# Altium PCB PCB1.PcbDoc
Units mm, origin at the board's own origin, x right, y up, seen from the top; angles counter-clockwise.
Board outline 45.72 x 38.1 mm, 2 copper layers (Top Layer, GND), stack 1.569 mm thick; 24 components, 18 nets, 130 pads, 10 vias.
Unrouted connection lines stored in the file: 1.
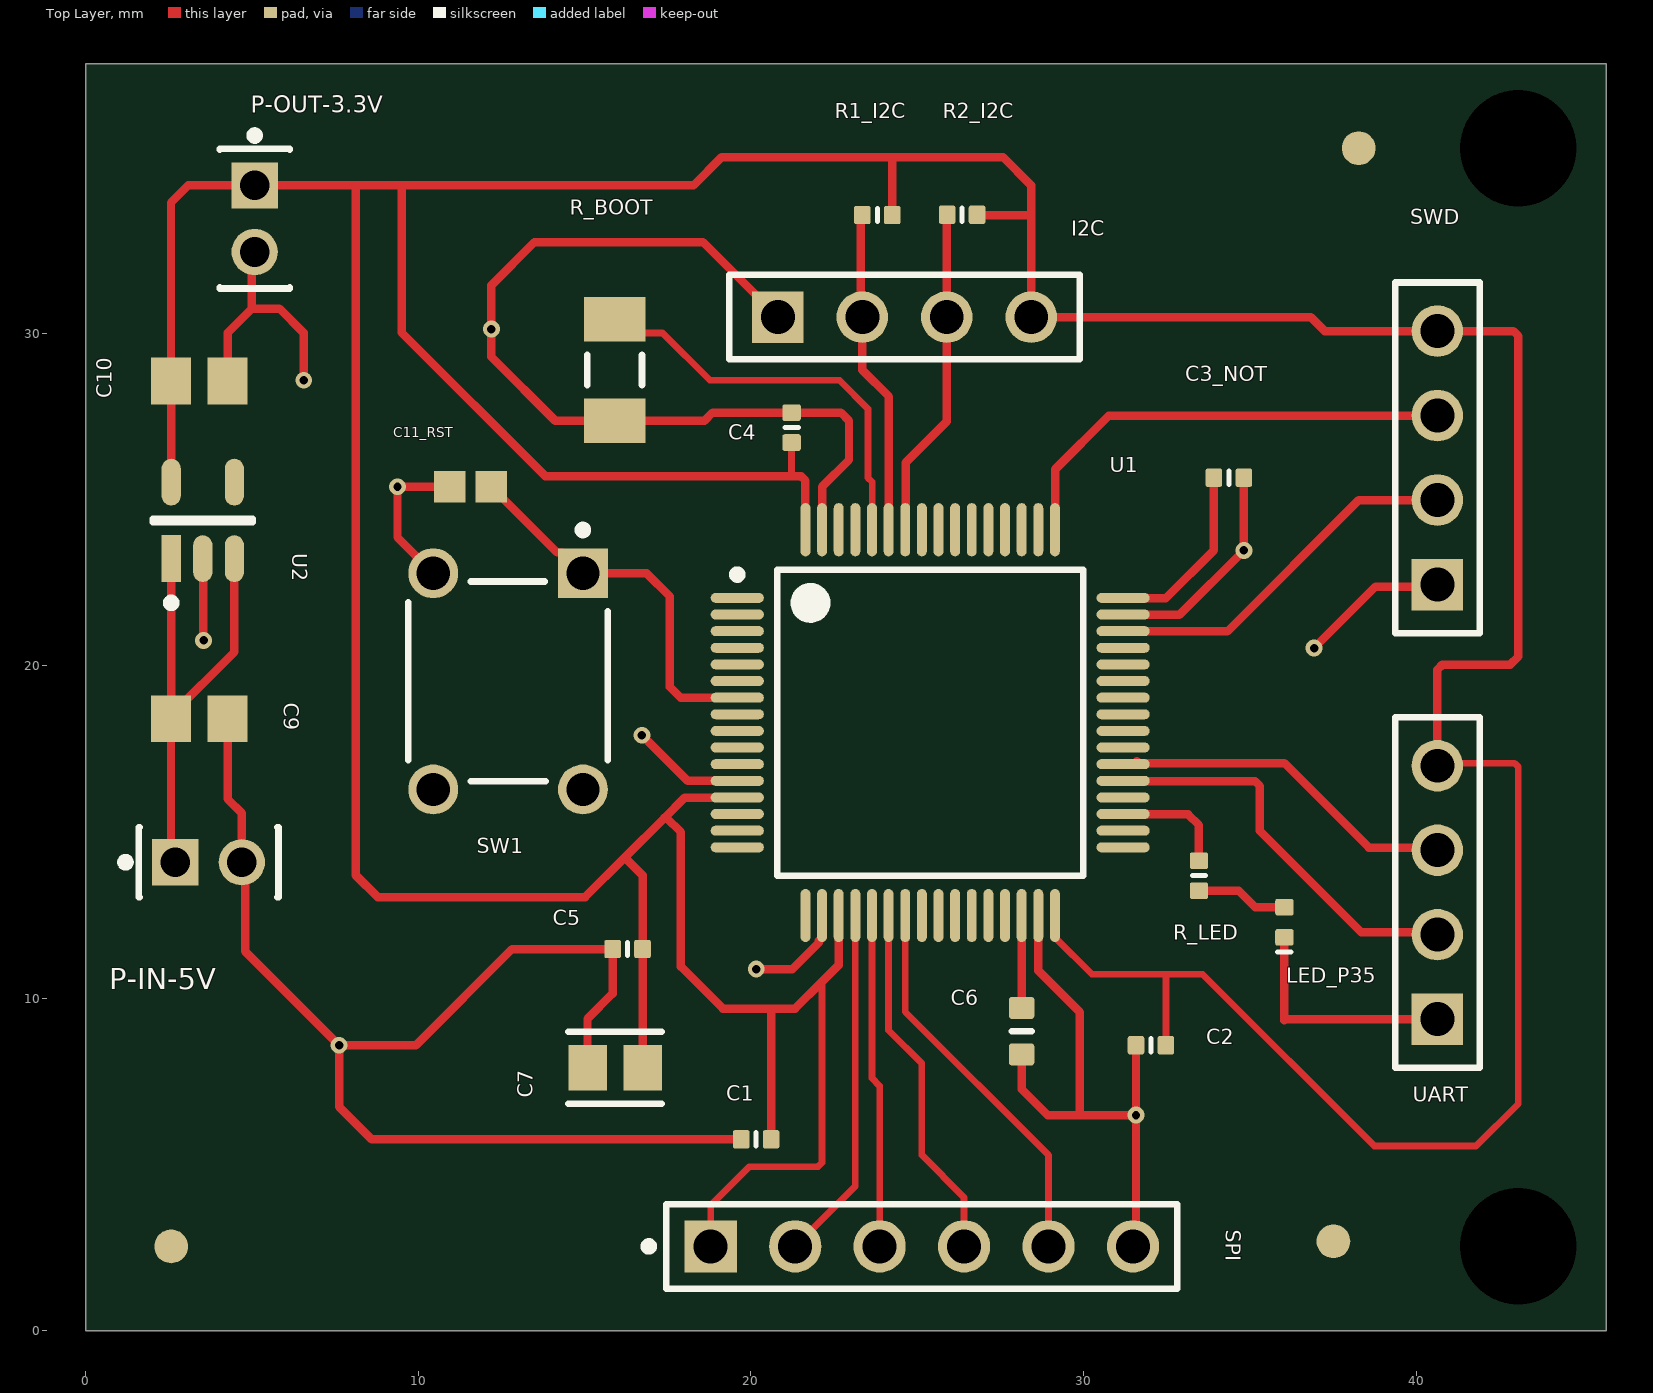
[diagram p0: Top Layer view]
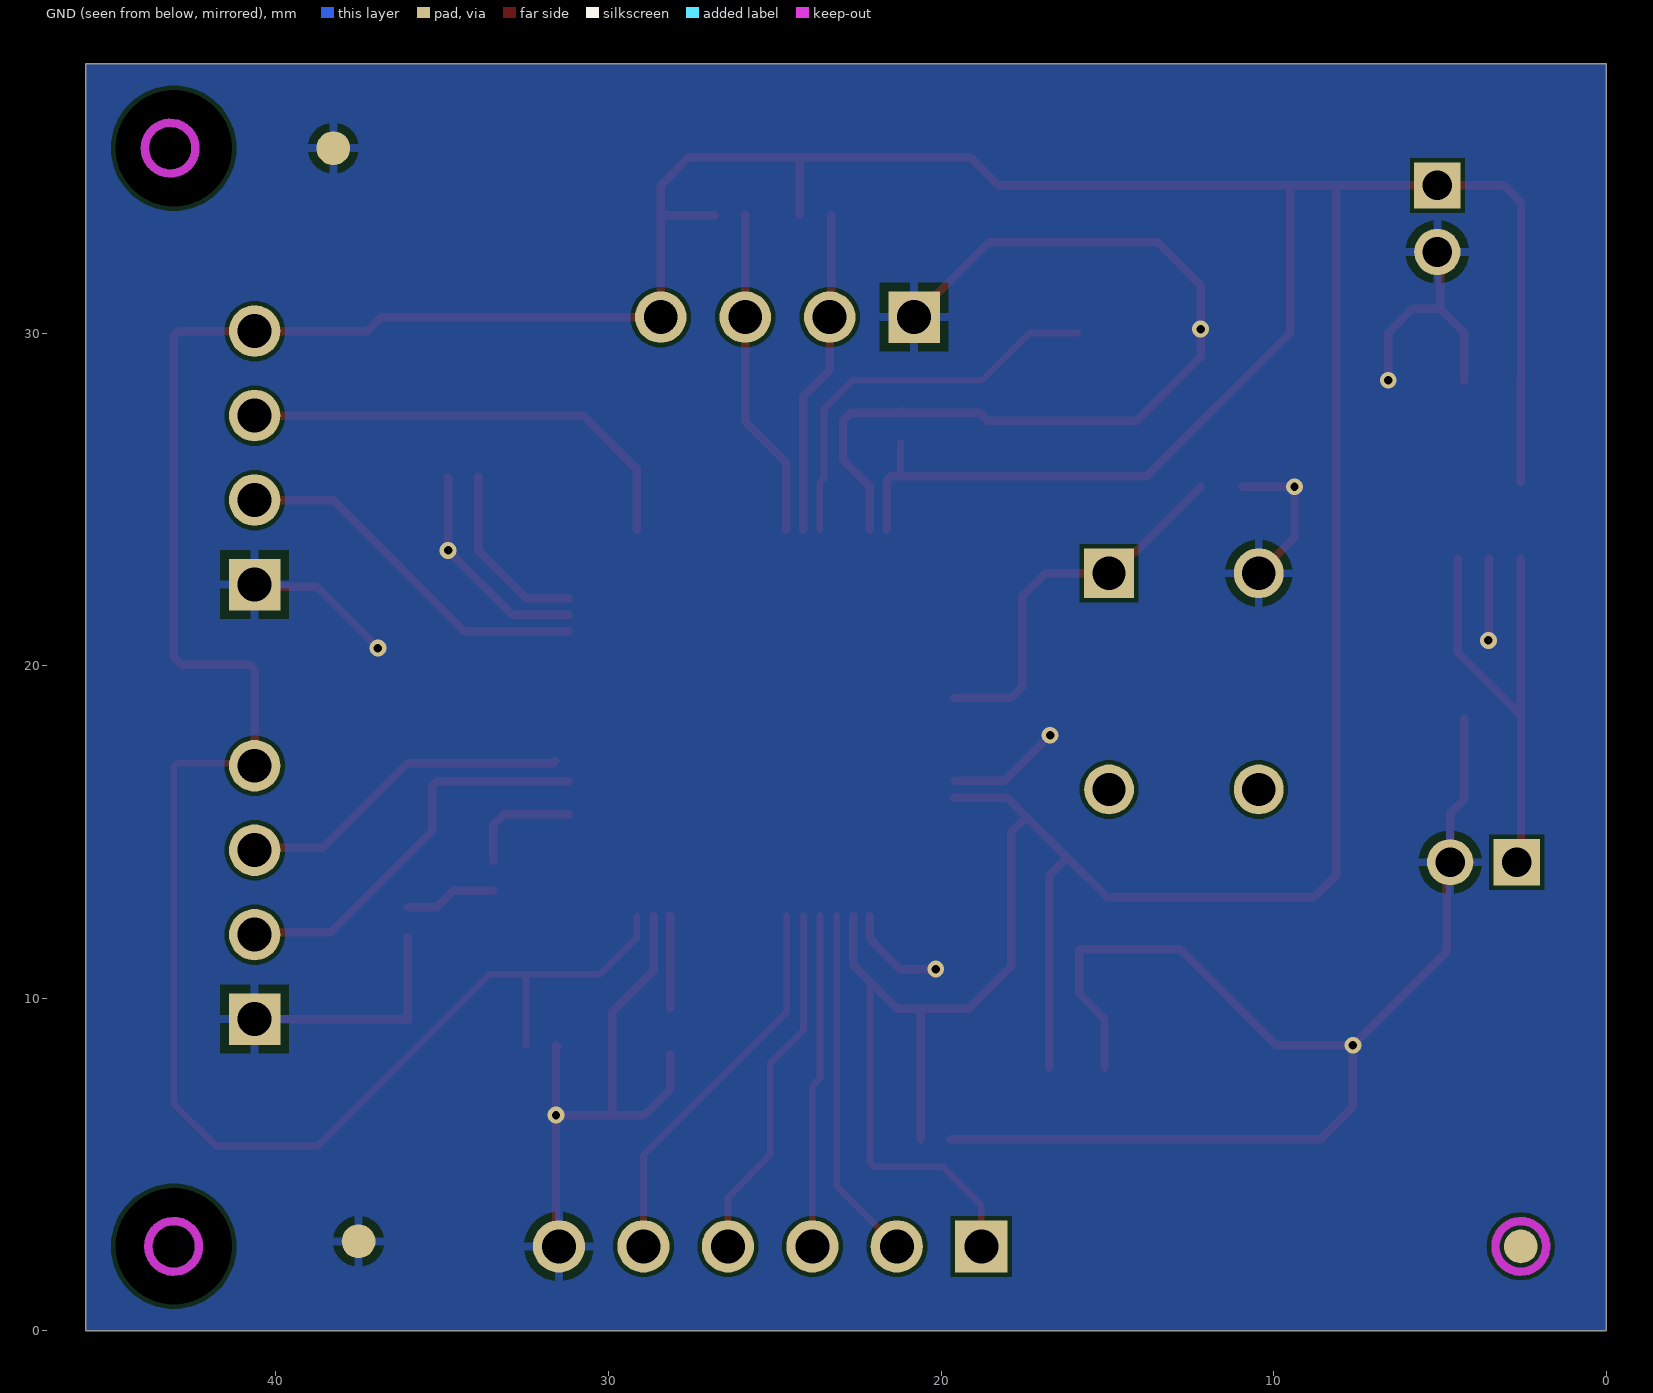
[diagram p1: GND view, seen from below]
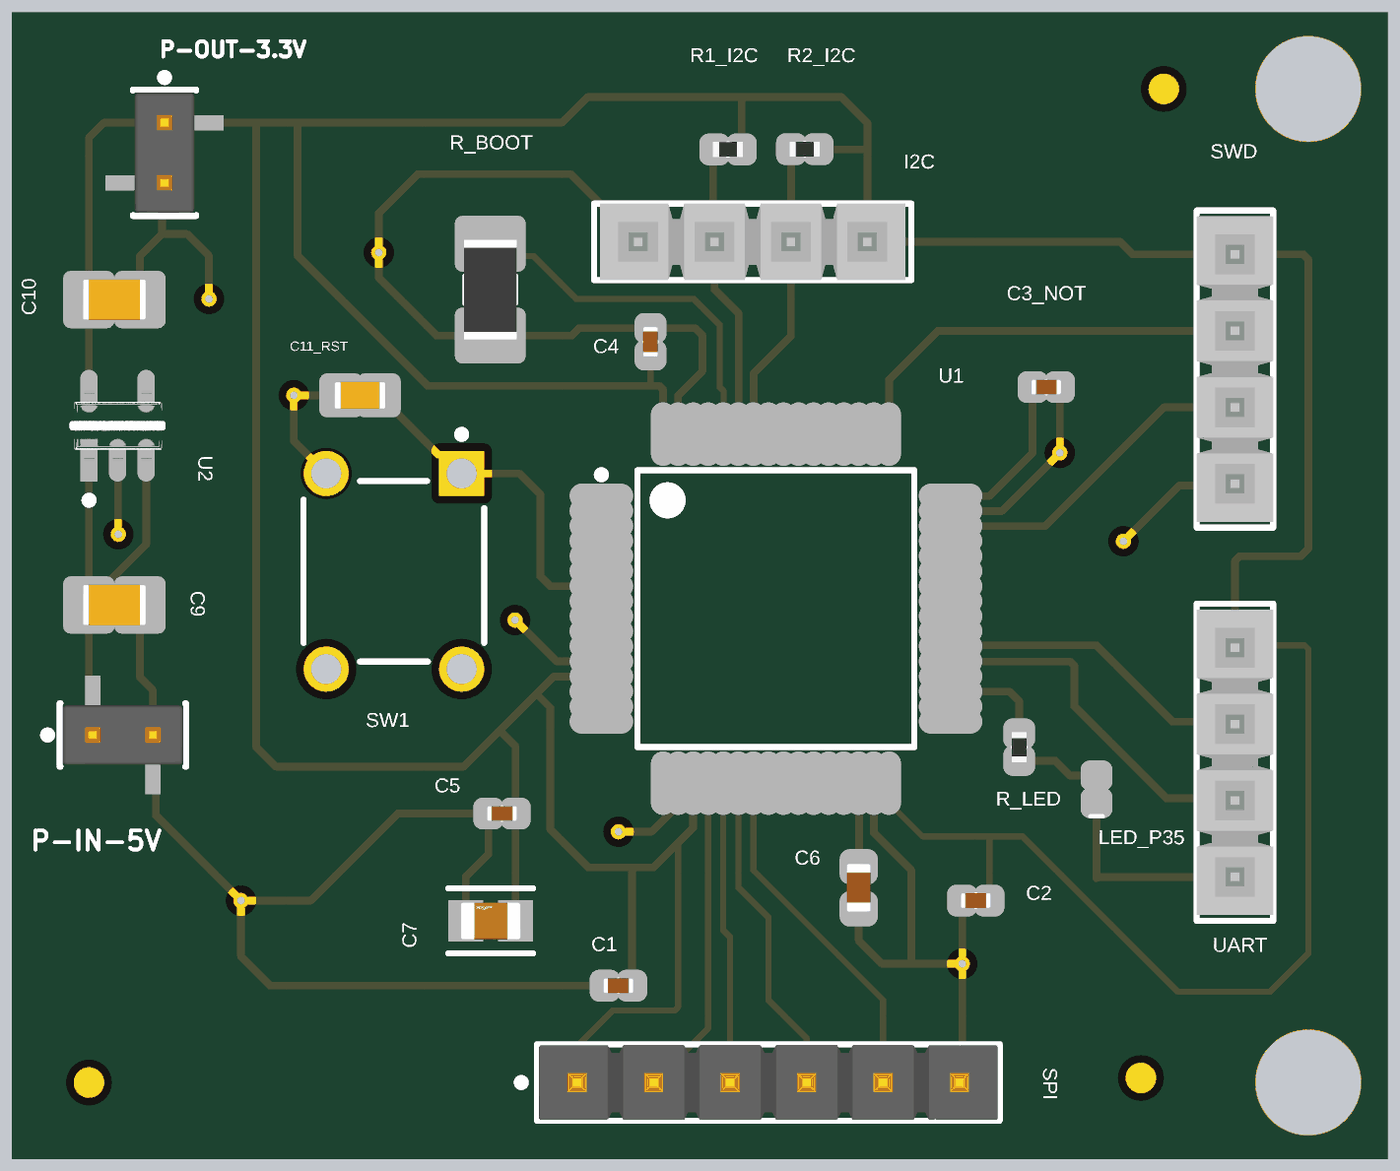
[diagram p2: 3D render of the assembled board from above, using the file's embedded part models]

## Layer stack, top to bottom
Top Solder: solder mask 0.0127, Solder Resist, Dk 3.3
Top Layer: signal copper 0.035
Dielectric1: core 1.4986, Core-043, Dk 4.3
GND: signal copper 0.035
Bottom Solder: solder mask 0.0127, Solder Resist, Dk 3.3

## Board outline
0,0 45.72,0 45.72,38.1 0,38.1

## Design rules (kind name [scope] priority, off if disabled: settings)
Clearance Clearance_Foot [All] p1: gap=0.127 ignorepadtopadclearanceinfootprint=FALSE
Clearance [All] p2: gap=0.127 ignorepadtopadclearanceinfootprint=FALSE
DiffPairsRouting [All] p1: maxlimit=0.254 minlimit=0.254 mostfreqgap=0.254 toplayer_minwidth=0.254 toplayer_maxwidth=0.254 toplayer_prefwidth=0.254 bottomlayer_minwidth=0.254 bottomlayer_maxwidth=0.254 bottomlayer_prefwidth=0.254 maxuncoupledlength=12.7
HoleSize [All] p1: absolutevalues=TRUE maxlimit=7.62 minlimit=0.254 maxpercent=80.000 minpercent=20.000
MinimumAnnularRing MinimumAnnularRing_User [All] p1: minimumring=0.124
MinimumAnnularRing [All] p2: minimumring=0.254
MinimumSolderMaskSliver MinimumSolderMaskSliver_User [All] p1: minsoldermaskwidth=0.178
MinimumSolderMaskSliver [All] p2: minsoldermaskwidth=0.254
PasteMaskExpansion [All] p1: expansion=0.254
PlaneClearance [All] p1: clearance=0.381
PlaneConnect [All] p1: pad.planeconnectstyle=Relief pad.reliefexpansion=0.508 pad.reliefentries=4 pad.reliefconductorwidth=0.254 pad.reliefairgap=0.254 via.planeconnectstyle=Direct via.reliefexpansion=0.508 via.reliefentries=4 via.reliefconductorwidth=0.254 via.reliefairgap=0.254
PolygonConnect [All] p1: thpad.connectstyle=Relief thpad.reliefconductorwidth=0.254 thpad.reliefentries=4 thpad.polygonreliefangle="90 Angle" thpad.airgapwidth=0.254 smdpad.connectstyle=Relief smdpad.reliefconductorwidth=0.254 smdpad.reliefentries=4 smdpad.polygonreliefangle="90 Angle" smdpad.airgapwidth=0.254 via.connectstyle=Direct via.reliefconductorwidth=0.254 via.reliefentries=4 via.polygonreliefangle="90 Angle" via.airgapwidth=0.254
RoomDefinition Sheet1 [InComponentClass('Sheet1')] p1: confinementstyle=ConfineIn formatcopy=TRUE lockcomponents=FALSE outline -281.625,-89.487 -230.825,-89.487 -230.825,-64.087 -281.625,-64.087
RoutingVias [All] p1: holewidth=0.254 width=0.508 viastyle="Through Hole" minholewidth=0.254 minwidth=0.508 maxholewidth=0.254 maxwidth=0.508
SMDNeckDown [All] p1: percent=100.000
SilkToSolderMaskClearance SilkToSolderMaskClearance_User [IsPad] p1: minsilkscreentomaskgap=0.076 clearancetoexposedcopper=TRUE
SilkToSolderMaskClearance SilkscreenOverComponentPads [IsPad] p2: minsilkscreentomaskgap=0.254 clearancetoexposedcopper=TRUE
SolderMaskExpansion [All] p1: expansion=0.254 istentingtop=FALSE
SupplyNets "Schematic Supply Nets_1" [InNet('GND')] p1: voltage=0.000
SupplyNets "Schematic Supply Nets_2" [InNet('3.3V')] p2: voltage=0.000
SupplyNets "Schematic Supply Nets" [InNet('+5')] p3: voltage=0.000
Width [All] p1: maxlimit=0.254 minlimit=0.203 preferedwidth=0.254
23 further rules are at their usual default settings.

## Components (designator, comment, footprint, x,y, rotation, side; value= is the part's Value field where it differs from the comment)
C1 "Capacitor 100nF +/-20% 25V 0402" CAPC0402(1005)60_L 20.16,5.759 r180 top value=100nF
C2 "Capacitor 100nF +/-20% 25V 0402" CAPC0402(1005)60_L 32.03,8.586 r180 top value=100nF
C3_NOT "Capacitor 100nF +/-20% 25V 0402" CAPC0402(1005)60_L 34.372,25.651 r0 top value=100nF
C4 "Capacitor 100nF +/-20% 25V 0402" CAPC0402(1005)60_L 21.225,27.159 r90 top value=100nF
C5 "Capacitor 100nF +/-20% 25V 0402" CAPC0402(1005)60_L 16.292,11.479 r180 top value=100nF
C6 "Capacitor 4.7µF +/-20% 10V 0603" CAPC0603(1608)100_L 28.141,9.011 r270 top value=4.7µF
C7 "GRM21BR61C106KE15K" FP-GRM21B-0_1-IPC_B 15.915,7.912 r180 top value=10µF
C9 "Capacitor 10 uF +/- 10% 16 V 0805" CAPC2013X135X45NL10T25 3.415,18.41 r0 top value=10µF
C10 "Capacitor 10 uF +/- 10% 16 V 0805" CAPC2013X135X45NL10T25 3.415,28.559 r0 top value=10µF
C11_RST "Capacitor 100 nF +/-10% 50 V 0603" CAPC1608X90X40NL10T20 11.573,25.376 r0 top value=100nF
I2C "MTSW-104-07-T-S-170" SMTC-MTSW-104-07-X-S-170 20.81,30.48 r0 top
LED_P35 "QBLP595-IB" QTB-QBLP595_V 36.041,12.285 r90 top
P-IN-5V "TMM-102-03-F-S" FP-TMM-102-03-F-S-MFG 3.695,14.09 r0 top
P-OUT-3.3V "TMM-102-03-F-S" FP-TMM-102-03-F-S-MFG 5.08,33.44 r270 top
R1_I2C "4D7KR2F" RESC0402(1005)_L 23.8,33.55 r0 top value=4.7k
R2_I2C "4D7KR2F" RESC0402(1005)_L 26.35,33.56 r0 top value=4.7k
R_BOOT "Resistor 10k +/-1% 1206 250 mW" RESC3216X60X45ML15T20 15.9,28.89 r270 top value=10k
R_LED "330R2J" RESC0402(1005)_L 33.472,13.686 r270 top value=330
SPI "HTSW-106-07-G-S" FP-HTSW-106-07-G-S-MFG 25.141,2.54 r0 top
SW1 "B3F-1000" OMRON-B3F-1000-4_V 12.7,19.53 r270 top
SWD "MTSW-104-07-T-S-170" SMTC-MTSW-104-07-X-S-170 40.64,22.44 r90 top
U1 "STM32F401RET6U" STM-LQFP64_L 25.391,18.289 r0 top
U2 "AP2112K-3.3TRG1" FP-SOT25-IPC_B 3.52,24.369 r90 top
UART "MTSW-104-07-T-S-170" SMTC-MTSW-104-07-X-S-170 40.64,9.372 r90 top

## Footprints (in the part's own frame and the unit in brackets; to place one, negate y for a bottom-side part, rotate by r counter-clockwise, add the part's x,y. Pads: shape width x height; smd on the part's side, far side on the other; paste and mask are expansions set on the pad)
CAPC0402(1005)60_L [mm] "Chip Capacitor, Body 1.0x0.5mm, Height 0.6mm, IPC High Density"
  rrect25% 0.5x0.55 smd: 1(-0.45,0) 2(0.45,0)
  silkscreen extent 0,-0.2 0,0.2, body extent -0.5,-0.25 0.5,0.25, height 0.6
CAPC0603(1608)100_L [mm] "Chip Capacitor, Body 1.6x0.8mm, Height 1.0mm, IPC High Density"
  rrect25% 0.66x0.76 smd: 1(-0.7,0) 2(0.7,0)
  silkscreen extent 0,-0.3 0,0.3, body extent -0.8,-0.4 0.8,0.4, height 0.95
CAPC1608X90X40NL10T20 [mm] "Chip Capacitor, 2-Leads, Body 1.70x0.90mm, IPC Medium Density"
  rect 0.95x0.95 smd: 1(-0.625,0) 2(0.625,0)
  body extent -0.85,-0.45 0.85,0.45, height 0.9
CAPC2013X135X45NL10T25 [mm] "Chip Capacitor, 2-Leads, Body 2.10x1.35mm, IPC Medium Density"
  rect 1.2x1.4 smd: 1(-0.85,0) 2(0.85,0)
  body extent -1.05,-0.67 1.05,0.67, height 1.35
FP-GRM21B-0_1-IPC_B [mm]
  rect 1.158x1.362 smd paste+0 mask+0: 1(-0.827,0) 2(0.827,0)
  silkscreen extent -1.41,-1.08 1.41,1.08, body extent -1.66,-0.93 1.66,0.93, height 0.25
FP-HTSW-106-07-G-S-MFG [mm]
  rect 1.57x1.57 hole 1.02 paste-2539.97 mask+0: 1(-6.35,0)
  round 1.57 hole 1.02 paste-2539.97 mask+0: 2(-3.81,0) 3(-1.27,0) 4(1.27,0) 5(3.81,0) 6(6.35,0)
  silkscreen extent -8.33,-1.27 7.68,1.27, body extent -7.78,-1.37 7.78,1.37, height 0.25
FP-SOT25-IPC_B [mm]
  rect 1.407x0.576 smd paste+0 mask+0: 1(-1.151,0.95)
  rrect100% 1.407x0.576 smd paste+0 mask+0: 2(-1.151,0) 3(-1.151,-0.95) 4(1.151,-0.95) 5(1.151,0.95)
  silkscreen extent -2.6,-1.5 0.05,1.5, body extent -2.1,-1.75 2.1,1.75, height 0.25
FP-TMM-102-03-F-S-MFG [mm]
  rect 1.39x1.39 hole 0.89 paste-2539.97 mask+0: 1(-1,0)
  round 1.39 hole 0.89 paste-2539.97 mask+0: 2(1,0)
  silkscreen extent -2.62,-1.05 2.1,1.05, body extent -2.1,-2.07 2.1,2.07, height 0.25
OMRON-B3F-1000-4_V [mm] "TH, 4-Leads, Body 6x6mm"
  rect 1.5x1.5 hole 1 paste-2539.97: 1(-3.25,2.25)
  round 1.5 hole 1 paste-2539.97: 2(3.25,2.25) 4(3.25,-2.25)
  round 1.5 hole 1 paste-2539.97 mask+0.102: 3(-3.25,-2.25)
  silkscreen extent -4.67,-3 3,3, body extent -3.4,-3 3.4,3, height 4.5
QTB-QBLP595_V [mm] "SMD, 2-Leads, Body 1x0.5mm"
  rrect25% 0.5x0.55 smd: 1(-0.455,0) 2(0.455,0)
  silkscreen extent -0.9,-0.2 -0.9,0.2, body extent -0.5,-0.25 0.5,0.25, height 0.5
RESC0402(1005)_L [mm] "Chip Resistor, Body 1.0x0.5mm, IPC High Density"
  rrect25% 0.5x0.55 smd: 1(-0.45,0) 2(0.45,0)
  silkscreen extent 0,-0.2 0,0.2, body extent -0.5,-0.25 0.5,0.25, height 0.3
RESC3216X60X45ML15T20 [mm] "Chip Resistor, 2-Leads, Body 3.3x1.75mm, IPC Low Density"
  rect 1.35x1.85 smd: 1(-1.525,0) 2(1.525,0)
  silkscreen extent -0.45,-0.82 0.45,0.82, body extent -1.65,-0.87 1.65,0.87, height 0.6
SMTC-MTSW-104-07-X-S-170 [mm] "Assembly .025\" [.64] SQ Post Terminal Strip, 1x4 Pins, Vertical, 2.54mm Pitch, Male"
  rect 1.55x1.55 hole 1.02: 1(0,0)
  round 1.55 hole 1.02: 2(2.54,0) 3(5.08,0) 4(7.62,0)
  silkscreen extent -1.46,-1.27 9.08,1.27, body extent -1.27,-1.27 8.89,1.27, height 6.86
STM-LQFP64_L [mm] "QFP, 64-Leads, Body 10x10mm, Pitch 0.5mm, IPC High Density"
  oval 1.6x0.3 smd: 1(-5.8,3.75) 2(-5.8,3.25) 3(-5.8,2.75) 4(-5.8,2.25) 5(-5.8,1.75) 6(-5.8,1.25) 7(-5.8,0.75) 8(-5.8,0.25) 9(-5.8,-0.25) 10(-5.8,-0.75) 11(-5.8,-1.25) 12(-5.8,-1.75) 13(-5.8,-2.25) 14(-5.8,-2.75) 15(-5.8,-3.25) 16(-5.8,-3.75) 33(5.8,-3.75) 34(5.8,-3.25) 35(5.8,-2.75) 36(5.8,-2.25) 37(5.8,-1.75) 38(5.8,-1.25) 39(5.8,-0.75) 40(5.8,-0.25) 41(5.8,0.25) 42(5.8,0.75) 43(5.8,1.25) 44(5.8,1.75) 45(5.8,2.25) 46(5.8,2.75) 47(5.8,3.25) 48(5.8,3.75)
  oval 0.3x1.6 smd: 17(-3.75,-5.8) 18(-3.25,-5.8) 19(-2.75,-5.8) 20(-2.25,-5.8) 21(-1.75,-5.8) 22(-1.25,-5.8) 23(-0.75,-5.8) 24(-0.25,-5.8) 25(0.25,-5.8) 26(0.75,-5.8) 27(1.25,-5.8) 28(1.75,-5.8) 29(2.25,-5.8) 30(2.75,-5.8) 31(3.25,-5.8) 32(3.75,-5.8) 49(3.75,5.8) 50(3.25,5.8) 51(2.75,5.8) 52(2.25,5.8) 53(1.75,5.8) 54(1.25,5.8) 55(0.75,5.8) 56(0.25,5.8) 57(-0.25,5.8) 58(-0.75,5.8) 59(-1.25,5.8) 60(-1.75,5.8) 61(-2.25,5.8) 62(-2.75,5.8) 63(-3.25,5.8) 64(-3.75,5.8)
  silkscreen extent -5.92,-4.6 4.6,4.6, body extent -5,-5 5,5, height 1.6

## Part data
C1 C2 C3_NOT C4 C5: library part CMP-001-00065-4, "Chip Capacitor, 100nF +/-20%, 25V, 0402, Thickness 0.6 mm", Case/Package=0402, Max Operating Temperature=85°C, Min Operating Temperature=-55°C, Tolerance=10%, Voltage Rating=25V, Mounting Technology=SMT, Pins=2
C6: library part CMP-001-00076-4, "Chip Capacitor, 4.7µF +/-20%, 10V, 0603, Thickness 1 mm", Case/Package=0603, Max Operating Temperature=85°C, Min Operating Temperature=-55°C, Tolerance=10%, Voltage Rating=10V, Mounting Technology=SMT, Pins=2
C7: library part CMP-001-00083-1, "16V 10uF X5R ±10% 0805 Multilayer Ceramic Capacitors MLCC - SMD/SMT ROHS", Case/Package=0805, Max Operating Temperature=85°C, Min Operating Temperature=-55°C, Tolerance=10%, Voltage Rating=16V, Mounting Technology="Surface Mount"
C9 C10: library part CMP-001-00015-6, "Chip Capacitor, 10 uF, +/- 10%, 16 V, 0805 (2012 Metric)", Capacitor Type=Ceramic, Case/Package=0805, Max Operating Temperature=85°C, Min Operating Temperature=-55°C, Tolerance=10%, Voltage Rating=16V, Mounting Technology=SM, Pins=2, RoHS Compliant=True
C11_RST: library part CMP-001-00017-6, "Chip Capacitor, 100 nF, +/- 10%, 50 V, 0603 (1608 Metric)", Capacitor Type=Ceramic, Case/Package=0603, Max Operating Temperature=125°C, Min Operating Temperature=-55°C, Tolerance=10%, Voltage Rating=50V, Mounting Technology=SM, Pins=2, RoHS Compliant=True
I2C SWD UART: library part CMP-002-00075-1, "Headers & Wire Housings Variable Height PCB Header Strips, 0.100 pitch"
LED_P35: library part CMP-007-00042-3, "Chip LED 0402, Blue, 0.02 A, 3.1 to 3.7 V, -40 to 80 degC, 2-Pin SMD, RoHS, Tape and Reel", Case/Package=0402, Colour=Blue, Mounting Technology=SMT, Pins=2, RoHS Compliant=Yes
P-IN-5V P-OUT-3.3V: library part CMP-002-00077-1, "Pin Header, Board-to-Board, Wire-to-Board, 2 mm, 1 Rows, 2 Contacts, Through Hole, TMM"
R1_I2C R2_I2C: library part CMP-009-00105-2, "4K7 0.063W 1% 0402 (1005 Metric)  SMD", Case/Package=0402, Power=63mW, Tolerance=1%, Mounting Technology=SMT, Pins=2
R_BOOT: library part CMP-009-00016-5, "Chip Resistor, 10 KOhm, +/- 1%, 0.25 W, -55 to 155 degC, 1206 (3216 Metric)", Case/Package=1206, Max Operating Temperature=155°C, Min Operating Temperature=-55°C, Power=250mW, Tolerance=1%, Voltage Rating=200V, Mounting Technology=SM, Pins=2, RoHS Compliant=True
R_LED: library part CMP-009-00095-2, "330R 0.063W 5% 0402 (1005 Metric)  SMD", Case/Package=0402, Power=63mW, Tolerance=5%, Mounting Technology=SMT, Pins=2
SPI: library part CMP-002-00078-1, "Pin Header, Vertical, Board-to-Board, 2.54 mm, 1 Rows, 6 Contacts, Through Hole, HTSW Series"
SW1: library part CMP-011-00004-2, "Tactile Switch, SPST-NO, 0.05 A, 24 V, -25 to 70 degC, 4-Pin THD, RoHS, Bulk", Contact Current Rating=50mA, Manufacturer="Omron Electronic Components", Max Contact Resistance=100mohm, Max Operating Temperature=70°C, Max Voltage Rating (DC)=24V, Min Operating Temperature=-25°C, Operating Force=100gf, Package Description="4-Pin Through Hole Device, Body 6 x 6 mm", Package Quantity=1500, Resistance=0.1Ohm, Case/Package=B3F-1000, Contact Material=Gold, Contact Plating=Gold, Current Rating=50mA, Datasheet URL=http://www.omron.com/ecb/products/pdf/en-b3f.pdf, Datasheet Version=Jan-15, Manufacturer URL=http://www.omron.com/, Max Current Rating=50mA, Mounting Technology=TH, Package Reference=B3F-1000, Packaging=Bulk, Pins=4, RoHS Compliant=True, Throw Configuration=SPST, Voltage Rating=24V, Voltage Rating (DC)=24V
U1: library part CMP-00000-1, "MCU 32-Bit STM32 ARM Cortex M4 RISC 512KB Flash 2.5V/3.3V 64-Pin LQFP Tray", Case/Package=LQFP, Frequency=84MHz, Max Supply Voltage=3.6V, Min Supply Voltage=1.7V, Memory Size=512kB, Number of I/Os=50, Packaging="Cut Tape", Pins=64, RAM Size=96kB, REACH SVHC=No, RoHS=Compliant
U2: library part CMP-019-00049-1, "AP2112 Series 0.6 A 3.3 V Fixed Output SMT LDO Linear Regulator - SOT23-5"

## Free pads (board coordinates)
  round 1.016 all layers, no hole mask+0.254: 2(38.276,35.56)
  round 1.016 all layers, no hole: 3(2.57,2.54) 4(37.515,2.692)
  round 1.524 hole 3.5: 5(43.075,35.56) 6(43.075,2.54)

## Via types
v1: diameter 0.508, hole 0.254, Top Layer to GND, 10 vias

## Nets (pads, with @x,y where several pads share a name; then routed paths per layer and width w, separated by ;. In a path a pad name is that pad's centre, name@x,y a point inside that pad or via, vN(x,y) a via of type N, cw(c..) or ccw(c..) an arc to the next point about the centre after c; other vN are vias at no path point)
3.3V: C1.1 C2.1 C3_NOT.1 C4.1 C5.1 C7.1 C10.1 I2C.4 P-OUT-3.3V.1 R1_I2C.2 R2_I2C.2 SPI.1 SWD.4 U1.13 U1.19 U1.32 U1.48 U1.64 U2.5 UART.4 | length 198.6
  Top Layer w0.203: SPI.1 18.791,3.767 19.96,4.936 22.022,4.936 22.141,5.055 22.141,10.497 ; 21.184,25.695 21.225,25.736 C4.1 ; U1.32@29.15,12.48 29.15,11.83 30.258,10.722 32.48,10.722 ; C2.1 32.48,10.722 ; UART.4 40.718,17.07 42.956,17.07 43.075,16.951 43.075,6.829 41.805,5.559 38.745,5.559 33.582,10.722 32.48,10.722
  Top Layer w0.254: U2.5 2.57,28.554 C10.1 2.565,33.925 3.08,34.44 P-OUT-3.3V.1 8.121,34.44 ; C7.1 C5.1 16.742,13.699 16.209,14.232 16.207,14.232 ; U1.13@19.6,16.03 18.005,16.03 17.399,15.424 ; C1.1 20.61,9.687 ; U1.64 21.641,25.564 21.51,25.695 21.184,25.695 13.823,25.695 9.5,30.018 9.5,34.44 ; U1.19 22.641,10.997 22.141,10.497 21.331,9.687 20.61,9.687 ; R1_I2C.2 24.25,35.29 ; R2_I2C.2@26.8,33.55 28.42,33.55 28.43,33.56 ; I2C.4@28.43,30.129 I2C.4 ; U1.48@31.2,22.03 32.48,22.03 33.918,23.469 33.918,25.648 C3_NOT.1 C3_NOT.1@33.922,25.676 ; UART.4 40.64,19.881 40.789,20.03 42.829,20.03 43.075,20.276 43.075,29.911 42.926,30.06 SWD.4 37.255,30.06 36.835,30.48 I2C.4 ; 8.121,34.44 8.121,13.699 8.78,13.04 15.015,13.04 16.207,14.232 ; 8.121,34.44 9.5,34.44 ; 9.5,34.44 18.275,34.44 19.125,35.29 24.25,35.29 ; 16.207,14.232 17.399,15.424 ; 17.399,15.424 17.469,15.424 17.895,14.998 17.895,10.952 19.16,9.687 20.61,9.687 ; 24.25,35.29 27.58,35.29 28.43,34.44 28.43,33.56 ; I2C.4 28.43,33.56
+5: C9.1 P-IN-5V.1 U2.1 U2.3 | length 14.4
  Top Layer w0.254: U2.1 2.57,18.415 C9.1 ; P-IN-5V.1@2.695,14.46 2.565,14.59 C9.1 ; U2.3 4.47,20.415 2.565,18.51 C9.1
GND: C1.2 C2.2 C3_NOT.2 C4.2 C5.2 C6.2 C7.2 C9.2 C10.2 C11_RST.1 I2C.1 LED_P35.1 P-IN-5V.2 P-OUT-3.3V.2 pad.2 pad.4 R_BOOT.2 SPI.6 SW1.3 SWD.1 U1.12 U1.18 U1.31 U1.47 U1.63 U2.2 UART.1 | length 123.3
  Top Layer w0.254: U2.2 3.532,23.206 3.532,20.772 v1(3.545,20.76) ; C9.2 4.265,15.995 4.695,15.565 P-IN-5V.2 4.792,13.993 4.792,11.414 v1(7.62,8.586) ; C10.2 4.265,30.006 4.997,30.739 ; P-OUT-3.3V.2@4.997,32.435 4.997,30.739 ; v1(6.555,28.582) 6.555,30.006 5.822,30.739 4.997,30.739 ; SW1.3 9.375,23.855 v1(9.375,25.381) 9.379,25.377 C11_RST.1 ; C7.2 15.088,9.385 15.842,10.14 C5.2 12.819,11.479 9.926,8.586 v1(7.62,8.586) ; v1(16.725,17.91) 18.096,16.539 U1.12 ; C1.2 8.6,5.759 7.62,6.739 v1(7.62,8.586) ; v1(20.16,10.875) 21.249,10.875 22.045,11.671 22.045,11.73 22.141,11.826 U1.18 ; I2C.1 18.555,32.735 13.495,32.735 12.198,31.438 v1(12.198,30.122) 12.198,29.284 14.117,27.365 R_BOOT.2 18.606,27.365 18.85,27.609 C4.2 ; C4.2@21.184,27.65 C4.2 ; U1.63@22.15,24.08 U1.63 22.141,25.381 22.95,26.19 22.95,27.365 22.706,27.609 C4.2 ; C6.2 28.141,7.27 28.924,6.487 29.89,6.487 ; U1.31 28.641,10.833 29.89,9.585 29.89,6.487 ; U1.47@31.2,21.53 32.887,21.53 v1(34.822,23.465) C3_NOT.2 C3_NOT.2@34.834,25.664 ; SPI.6 31.58,2.628 v1(31.58,6.487) ; C2.2@31.53,8.536 C2.2 v1(31.58,6.487) ; LED_P35.1 36.041,9.332 36.082,9.372 UART.1 ; v1(36.936,20.53) 38.786,22.38 40.58,22.38 SWD.1 ; 29.89,6.487 v1(31.58,6.487)
I2C_SCL: I2C.3 R2_I2C.1 U1.58 | length 10
  Top Layer w0.254: U1.58@24.65,24.08 24.65,26.101 25.89,27.341 I2C.3 25.895,30.485 25.895,33.555 R2_I2C.1
I2C_SDA: I2C.2 R1_I2C.1 U1.59 | length 9.8
  Top Layer w0.254: R1_I2C.1@23.3,33.55 23.3,30.53 I2C.2 23.35,28.89 24.15,28.09 U1.59@24.15,24.08
NetC11_RST_2: C11_RST.2 SW1.1 U1.7 | length 11.6
  Top Layer w0.254: C11_RST.2 14.171,23.403 14.327,23.403 SW1.1 16.865,22.78 17.565,22.08 17.565,19.36 17.895,19.03 U1.7@19.6,19.03
NetLED_P35_2: LED_P35.2 R_LED.2 | length 2.8
  Top Layer w0.254: R_LED.2@33.497,13.236 R_LED.2 34.666,13.236 35.162,12.74 LED_P35.2
NetR_BOOT_1: R_BOOT.1 U1.60 | length 12.2
  Top Layer w0.203: R_BOOT.1@15.9,30.006 17.343,30.006 18.767,28.582 22.667,28.582 23.525,27.724 23.525,25.648 23.65,25.523 U1.60@23.65,24.098
NetR_LED_1: R_LED.1 U1.35 | length 3.5
  Top Layer w0.254: U1.35@31.2,15.53 33.147,15.53 33.472,15.205 R_LED.1
NetSPI_2: SPI.2 U1.20 | length 10.7
  Top Layer w0.203: SPI.2 23.141,4.35 U1.20
NetSPI_3: SPI.3 U1.21 | length 10
  Top Layer w0.203: U1.21 23.641,7.598 23.871,7.368 SPI.3
NetSPI_4: SPI.4 U1.22 | length 10.9
  Top Layer w0.203: U1.22 24.141,9.038 25.141,8.038 25.141,5.282 26.411,4.012 SPI.4
NetSPI_5: SPI.5 U1.23 | length 11.6
  Top Layer w0.203: U1.23 24.641,9.592 28.951,5.282 SPI.5@28.951,2.692
RX: U1.38 UART.3 | length 10.1
  Top Layer w0.254: U1.38@31.607,17.126 31.663,17.07 36.041,17.07 38.581,14.53 UART.3@40.64,14.53
SWCLK: SWD.3 U1.49 | length 14
  Top Layer w0.254: U1.49@29.15,24.08 29.15,25.905 30.765,27.52 SWD.3
SWDIO: SWD.2 U1.46 | length 11.1
  Top Layer w0.254: U1.46@31.2,21.03 34.326,21.03 38.276,24.98 SWD.2
TX: U1.37 UART.2 | length 12.1
  Top Layer w0.254: U1.37@31.2,16.53 35.157,16.53 35.306,16.381 35.306,15.034 38.35,11.99 UART.2@40.64,11.99
Vcap_1: C6.1 U1.30 | length 2.8
  Top Layer w0.254: U1.30 28.15,12.48 C6.1@28.15,9.711
pads on no net: SW1.2 SW1.4 U1.1 U1.2 U1.3 U1.4 U1.5 U1.6 U1.8 U1.9 U1.10 U1.11 U1.14 U1.15 U1.16 U1.17 U1.24 U1.25 U1.26 U1.27 U1.28 U1.29 U1.33 U1.34 U1.36 U1.39 U1.40 U1.41 U1.42 U1.43 U1.44 U1.45 U1.50 U1.51 U1.52 U1.53 U1.54 U1.55 U1.56 U1.57 U1.61 U1.62 U2.4

## Polygon pours and split planes (outlines as drawn)
GND on GND "GND_L02_P000" (solid, pour order 0): 45.72,38.1 0,38.1 0,0 45.72,0

## Keep-outs
GND:
  circle w0.254: c43.18,35.56 r0.762
  circle w0.254: c43.075,2.54 r0.762
  circle w0.254: c2.57,2.54 r0.762